# EAGLE board GC CH340G USBC (EAGLE 9.6.1)
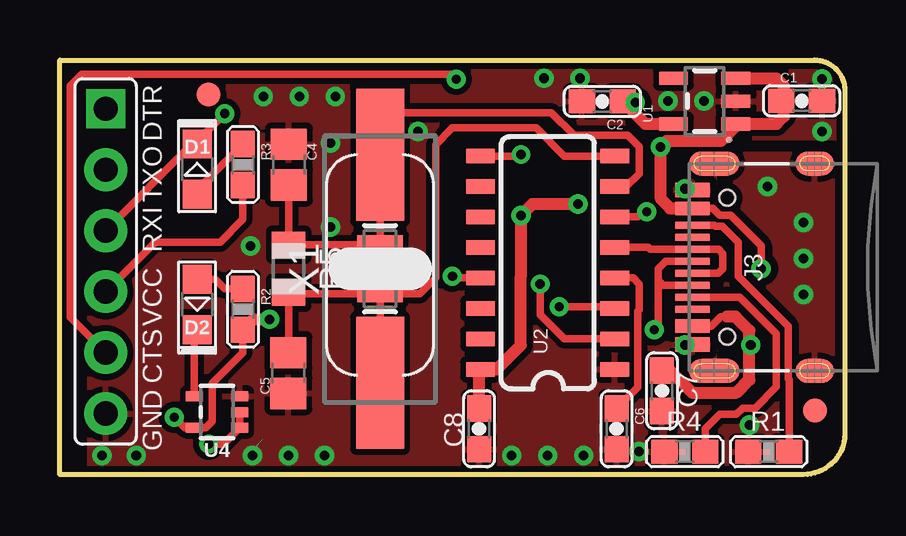
[diagram p0: board, top side]
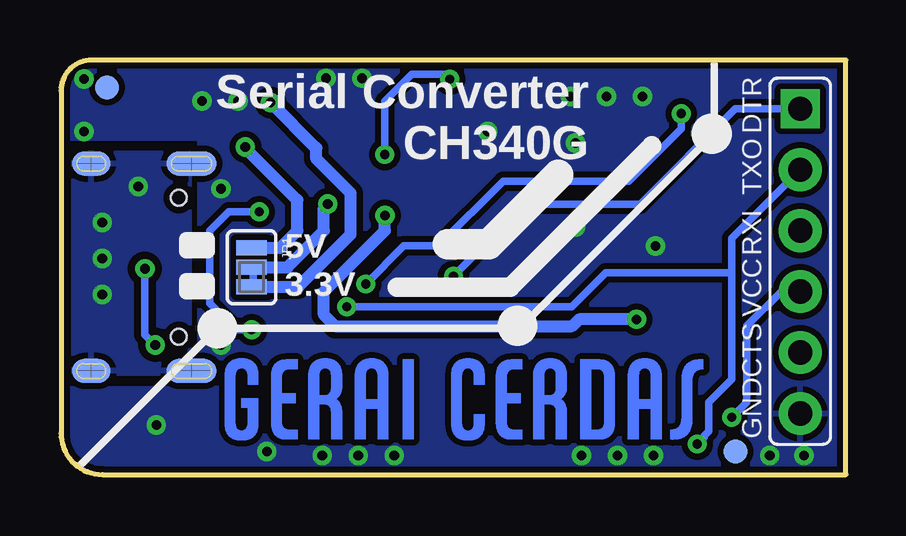
[diagram p1: board, bottom side, seen from below]

Size 32.7 x 17.27 mm. Coordinates in mm from the lower left corner, seen from the top.
Outline: 0,17.27 31.43,17.27 arc-90 32.7,16 32.7,1.72 arc-90 30.98,0 0,0 0,17.27
Copper layers (1*16): Top 0.035mm / dielectric 1.5mm / Bottom 0.035mm
Design rules "Gerai_Cerdas_DRU_v2_0_4mil": minimum track width 6mil, minimum drill 0.4mm, track to track 6mil, track to pad 6mil, pad to pad 6mil, via to via 6mil, smd to smd 0mil, copper to edge 10mil, drill to drill 10mil, minimum pad ring 12mil, minimum via ring 8mil, stop-mask expansion 2mil, vias tented up to drill 25mil, thermal gap 10mil
Net classes: 1 power: width 0.178 mm

## Footprints (pad centres in the part's own frame; a part is rotated, then mirrored left to right if it is on the bottom)
C0603 = smd 1.1 x 1: 1 -0.85,0; 2 0.85,0
C0805 = smd 1.3 x 1.5: 1 -0.85,0; 2 0.85,0
LED0805 = smd 1.2 x 1.2: A 0,-1.05; C 0,1.05
CON-FTDI = drill 1.016 pad 1.778: CTS 3.81,0; GND 6.35,0; RXI -1.27,0; TX0 -3.81,0; VCC 1.27,0 | drill 1 square: DTR -6.35,0
USB-C-16P = smd 0.3 x 1.45: A5 -1.25,0; A6 -0.25,0; A7 0.25,0; A8 1.25,0; B5 1.75,0; B6 0.75,0; B7 -0.75,0; B8 -1.75,0 | smd 0.6 x 1.45: GND -3.225,0; GND2 3.225,0 | smd 1 x 2.1: SHLD1 -4.32,-0.915; SHLD2 4.32,-0.915 | smd 1 x 2.1 bottom: SHLD3 -4.32,-0.915; SHLD4 4.32,-0.915 | smd 1 x 1.6: SHLD5 -4.32,-5.095; SHLD8 4.32,-5.095 | smd 1 x 1.6 bottom: SHLD6 -4.32,-5.095; SHLD7 4.32,-5.095 | smd 0.55 x 1.45: VBUS1 -2.45,0; VBUS2 2.45,0 | hole 0.65: -2.89,-1.445; 2.89,-1.445
PAD-JUMPER-3-2OF3_NC_BY_PASTE_YES_SILK_FULL_BOX = smd 0.635 x 1.27: 1 -0.813,0; 2 0,0; 3 0.813,0
FIDUCIAL-1X2 = smd 1 x 1: 1 0,0
R0603 = smd 1.1 x 1: 1 -0.85,0; 2 0.85,0
R0805 = smd 1.1 x 1.4: 1 -1,0; 2 1,0
SOT23-5 = smd 0.55 x 1.2: 1 -0.95,-1.3; 2 0,-1.3; 3 0.95,-1.3; 4 0.95,1.3; 5 -0.95,1.3
SO016 = smd 0.6 x 1.2: 1 -4.445,-2.8; 2 -3.175,-2.8; 3 -1.905,-2.8; 4 -0.635,-2.8; 5 0.635,-2.8; 6 1.905,-2.8; 7 3.175,-2.8; 8 4.445,-2.8; 9 4.445,2.8; 10 3.175,2.8; 11 1.905,2.8; 12 0.635,2.8; 13 -0.635,2.8; 14 -1.905,2.8; 15 -3.175,2.8; 16 -4.445,2.8
SOT353 = smd 0.42 x 0.7: 1 -0.65,-0.95; 2 0,-0.95; 3 0.65,-0.95; 4 0.65,0.95; 5 -0.65,0.95
SMD-CRYSTAL = smd 5.5 x 2: 1 -4.75,0; 2 4.75,0
CSTCE* = smd 0.7 x 1.905: 1 -1.041,0; 2 0,0; 3 1.041,0

## Placement (x,y rotation side)
C1  1.0uF  [C0603]  30.9,15.57 0 top
C2  1.0uF  [C0603]  22.6,15.54 180 top
C4  10pF  [C0805]  9.54,12.91 270 top
C5  10pF  [C0805]  9.51,4.23 90 top
C6  10nF  [C0603]  23.19,1.91 270 top
C7  0.1uF  [C0603]  25.08,3.49 270 top
C8  [C0603]  17.46,1.91 90 top
D1  GREEN  [LED0805]  5.71,12.72 0 top
D2  Yellow  [LED0805]  5.71,7.08 180 top
FRAME1  FRAME-LETTER  [CREATIVE_COMMONS]  -1.32,-17.78 0 top  (outside the outline)
J1  CON-FTDI-DIP  [CON-FTDI]  1.91,8.89 270 top
J3  [USB-C-16P]  26.35,8.64 90 top
JP1  [PAD-JUMPER-3-2OF3_NC_BY_PASTE_YES_SILK_FULL_BOX]  24.77,8.64 270 bottom
JP3  FIDUCIAL1X2  [FIDUCIAL-1X2]  6.19,15.84 0 top
JP4  FIDUCIAL1X2  [FIDUCIAL-1X2]  31.46,2.67 0 top
JP5  FIDUCIAL1X2  [FIDUCIAL-1X2]  4.6,0.95 0 bottom
JP6  FIDUCIAL1X2  [FIDUCIAL-1X2]  30.8,16.13 0 bottom
R1  5.1k  [R0603]  29.53,0.95 0 top
R2  1K  [R0603]  7.62,6.88 270 top
R3  330  [R0603]  7.62,12.91 270 top
R4  5.1k  [R0603]  26.04,0.95 0 top
R5  [R0805]  9.53,8.57 270 top
U1  AP2112-3.3V  [SOT23-5]  26.86,15.56 90 top
U2  CH340G  [SO016]  20.32,8.83 90 top
U4  74LVC1G08SE  [SOT353]  6.54,2.6 90 top
U$1  LOGO-GC-TEXT-M-GOLD  [GC-TEXT-M-GOLD]  25.88,1.43 0 bottom
X1  [SMD-CRYSTAL]  13.34,8.57 90 top
X2  RESONATORSMD-CSTCEXX  [CSTCE*]  13.34,8.57 90 top

## Library data of the parts
C1 C2 C4-C8 D1 D2 J1 R1-R5 U$1 X1 X2 = geraicerdas
FRAME1 = SparkFun-Aesthetics
J3 = SparkFun-Connectors; PROD_ID: CONN-14122
JP1 = SparkFun-Passives
JP3-JP6 = SparkFun
U1 = SparkFun-PowerIC; PROD_ID: VREG-12457
U2 = SparkFun-DigitalIC; PROD_ID: IC-13498
U4 = Serial-Basic; PROD_ID: IC-10841

## Nets
3.3V [power]: C2.1 JP1.3 U1.5
5V: C1.1 C7.1 J3.VBUS1 J3.VBUS2 JP1.1 U1.1 U1.3
!CTS: J1.CTS U2.9
!DTR: J1.DTR U2.13
CC1: J3.A5 R4.2
CC2: J3.B5 R1.2
D+: J3.A6 J3.B6 U2.5
D-: J3.A7 J3.B7 U2.6
GND [power]: C1.2 C2.2 C4.1 C5.1 C6.2 C7.2 C8.1 J1.GND J3.GND J3.GND2 R1.1 R4.1 U1.2 U2.1 U4.3 X2.2
N$1: D1.A R3.1
N$2: D2.A R2.1
N$3: C5.2 R5.2 U2.8 X1.1 X2.1
N$4: C4.2 R5.1 U2.7 X1.2 X2.3
N$5: D2.C U4.4
RXI: J1.TX0 U2.3 U4.1 U4.2
SHLD: J3.SHLD1 J3.SHLD2 J3.SHLD3 J3.SHLD4 J3.SHLD5 J3.SHLD6 J3.SHLD7 J3.SHLD8
TXO: D1.C J1.RXI U2.2
V3: C6.1 U2.4
VCC: C8.2 J1.VCC JP1.2 R2.2 R3.2 U2.16 U4.5

## Tracks (layer width: path | path; a pad name or v marks a point on that pad's centre or on a via)
3.3V  (via drill 0.4)
  Top 0.508: U1.5 24.39,14.61 C2.1 23.93,15.54 v23.97,15.5
  Bottom 0.508: JP1.3 22.82,7.82 20.64,10 20.64,11.73 22.07,13.16 22.07,13.6 v23.97,15.5
5V  (via drill 0.4)
  Top 0.305: 27.78,6.58 27.53,6.58 27.14,6.19 J3.VBUS1 | J3.VBUS2 27.2,11.09 27.5,10.79 27.94,10.79 29.21,9.53 v29.21,8.57 | v28.78,5.4 28.72,5.4
  Top 0.508: U1.3 29.85,16.51 30.16,16.19 30.16,15.68 | 30.16,15.68 C1.1 | U1.1 28.26,14.61 | 28.26,14.61 29.85,14.61 30.16,14.92 30.16,15.68 | 28.26,14.61 27.54,13.89 25.26,13.89 v25.03,13.65 25.03,11.48 25.43,11.09 J3.VBUS2 | 27.78,6.58 28.14,6.58 28.72,6 28.72,5.4 28.72,3.94 28.19,3.41 26.34,3.41 25.41,4.34 C7.1
  Bottom 0.305: v29.21,8.57 29.21,5.83 v28.78,5.4
  Bottom 0.508: JP1.1 23.57,9.45 22.86,10.16 22.86,11.43 25.03,13.6 v25.03,13.65
!CTS  (via drill 0.38)
  Top 0.305: J1.CTS 0.43,6.55 0.43,16.19 0.91,16.67 5.84,16.67 5.85,16.67 16.5,16.67 v16.5,16.47 | U2.9 19.14,13.27 v19.21,13.34
  Bottom 0.305: v19.21,13.34 19.21,15.56 18.1,16.67 16.71,16.67 v16.5,16.47
!DTR  (via drill 0.38)
  Top 0.305: U2.13 16.41,8.19 v16.35,8.26
  Bottom 0.305: v16.35,8.26 13.34,11.27 8.57,11.27 4.6,15.24 J1.DTR
CC1
  Top 0.305: R4.2 26.88,1.91 27.49,2.51 28.18,2.51 28.44,2.77 28.96,2.77 29.84,3.65 29.84,5.87 28.33,7.39 J3.A5
CC2
  Top 0.305: R1.2 30.38,3.95 30.34,3.98 30.34,6.17 28.26,8.26 28.26,9.68 27.6,10.34 27.3,10.34 27.26,10.39 J3.B5
D+
  Top 0.305: U2.5 24.51,9.46 24.59,9.39 J3.B6 27.44,9.39 27.62,9.21 27.62,8.57 27.44,8.39 J3.A6
D-  (via drill 0.38)
  Top 0.305: J3.B7 25.13,7.89 24.92,8.1 | 24.92,8.1 24.92,8.57 25.24,8.89 J3.A7 | 24.92,8.1 24.92,6.03 v24.77,6.03 | v24.45,10.95 24.29,10.95 24.07,10.73 U2.6
  Bottom 0.305: v24.77,6.03 25.4,6.03 26.51,7.14 26.51,10.16 25.72,10.95 v24.45,10.95
GND  (via drill 0.4)
  Top 0.305: J3.GND2 26.08,11.86 v26.04,11.91
  other vias: 11.27,13.81 11.27,10.32 7.94,9.53 1.75,0.79 20.32,0.79 9.53,0.79 24.13,0.95 28.73,2.06 21.66,16.51 14.92,14.29 11.47,15.76 26.04,5.4 31.75,14.29 25.33,15.56 3.18,0.79 8.03,0.79 11.03,0.79 18.82,0.79 21.82,0.79 31.75,16.49 26.83,15.56 20.16,16.51 9.97,15.76 8.47,15.76
  pour Bottom (isolate 0.254): 0.17,-0.03 0.17,17.27 32.7,17.27 32.7,14.03 26.92,14.03 26.92,3.56 32.7,3.56 32.7,-0.03
  pour Top (isolate 0.254, rank 2): 1.27,-0.03 1.27,17.27 32.7,17.27 32.7,14.03 26.97,14.03 26.97,3.56 32.7,3.56 32.7,-0.03
N$1
  Top 0.305: D1.A 5.71,11.86 R3.1
N$2
  Top 0.305: R2.1 6.87,7.73 6.47,8.13 D2.A
N$3
  Top 0.305: X2.1 X1.1 | X2.1 13.18,7.53 9.57,7.53 R5.2 9.53,5.09 C5.2 | U2.8 21.02,13.27 19.84,14.45 16.35,14.45 15.65,13.75 15.65,8.19 14.99,7.53 X2.1
N$4
  Top 0.305: 13.34,12.06 X2.3 13.42,9.53 13.97,9.53 13.92,9.57 R5.1 C4.2 | 13.34,12.06 X1.2 | 13.34,12.06 12.86,12.54 12.86,15.08 20.48,15.08 21.43,14.13 23.65,14.13 24.13,13.65 24.13,12.54 23.59,12 U2.7
N$5
  Top 0.305: U4.4 5.59,5.91 D2.C
N$6
  Bottom 0.305: 24.68,7.8 24.68,8.6
RXI  (via drill 0.38)
  Top 0.305: U4.2 U4.1 6.81,1.27 v6.19,1.27 | v20.8,6.99 23.06,6.99 U2.3
  Bottom 0.305: v20.8,6.99 11.43,6.99 10,8.41 4.76,8.41 | v6.19,1.27 5.91,1.55 5.91,1.61 5.71,1.81 5.71,3.02 4.76,3.97 4.76,8.41 | J1.TX0 4.76,9.84 4.76,8.41
SHLD  (via drill 0.4)
  other vias: 30.98,9 30.98,10.5 30.98,7.5 29.48,12
  pour Top (isolate 0.305): 32.38,13.34 27.3,13.34 27.3,4.19 32.38,4.19
  pour Bottom (isolate 0.305): 32.38,13.4 27.37,13.4 27.37,4.19 32.38,4.19
TXO  (via drill 0.38)
  Top 0.305: J1.RXI 5.52,13.78 D1.C 5.71,13.89 v6.87,15.04 | U2.2 21.02,5.65 20,6.67 v20,7.94
  Bottom 0.305: v20,7.94 18.41,9.53 16.99,9.53 14.29,12.22 9.05,12.22 6.87,14.4 v6.87,15.04
V3
  Top 0.305: U2.4 23.88,8.19 24.13,7.94 24.13,6.86 24.07,6.8 24.07,3.63 C6.1
VCC  (via drill 0.38, 0.4)
  Top 0.305: R2.2 7.62,5.08 6.35,3.81 6.35,2.22 6.08,1.95 U4.5 5.19,1.95 v4.76,2.38 | J1.VCC 3.97,9.68 6.67,9.68 7.62,10.64 R3.2
  Top 0.508: C8.2 17.46,4.32 U2.16 18.19,4.38 19.2,5.39 19.2,8.27 19.21,8.28 v19.21,10.79 19.68,11.27 v21.59,11.27 | R2.2 8.05,6.47 v8.73,6.47
  Bottom 0.305: v4.76,2.38 4.13,3.02 4.13,6.19 2.7,7.62 J1.VCC
  Bottom 0.508: v8.73,6.47 11.12,6.47 11.4,6.18 21.27,6.18 21.75,6.66 21.75,7.62 19.21,10.16 v19.21,10.79 | JP1.2 23.27,8.64 21.75,10.16 21.75,11.11 v21.59,11.27

## Text on the board
bPlace: Serial Converter / CH340G | 5V | 3.3V
tValues: Close
Measures: All dimensions in inches
tDocu: N. Seidle